# EAGLE board digitboard (EAGLE 9.5.2)
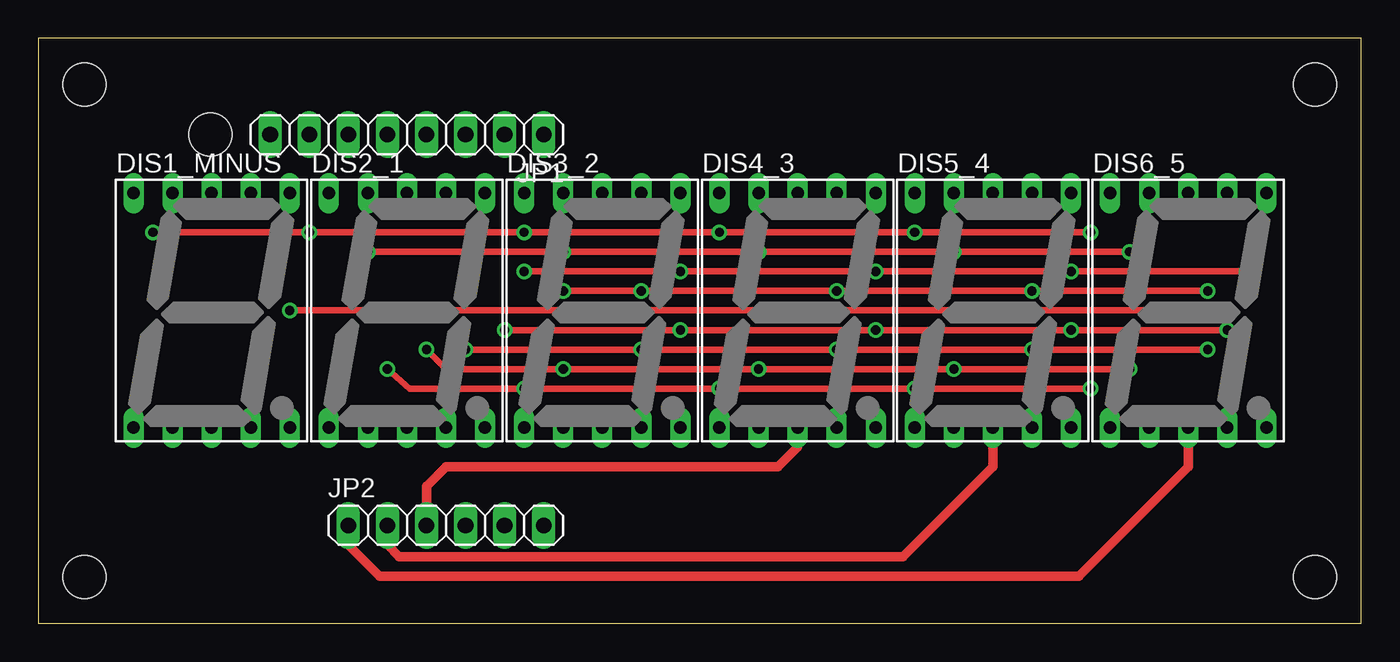
[diagram p0: board, top side]
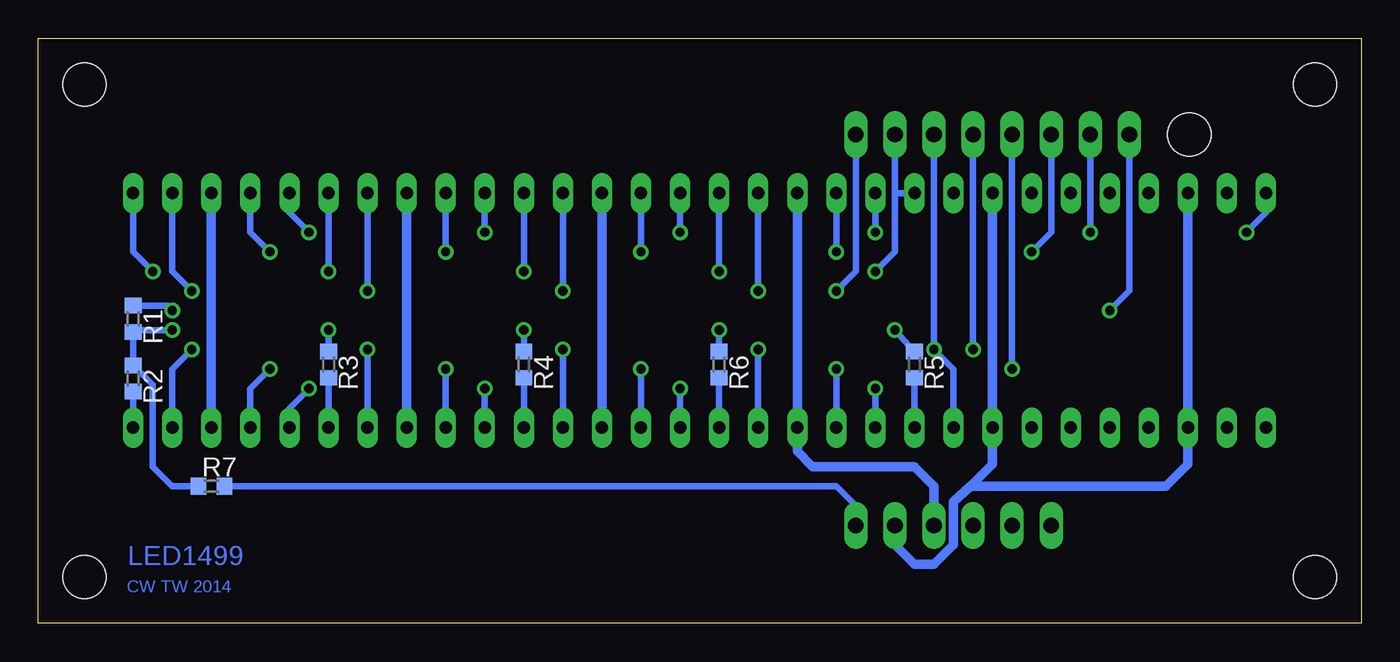
[diagram p1: board, bottom side, seen from below]

Size 86 x 38 mm. Coordinates in mm from the lower left corner, seen from the top.
Outline: 0,0 86,0 86,38 0,38 0,0
Copper layers (1*16): Top 0.035mm / dielectric 1.5mm / Bottom 0.035mm
Design rules "eigene_max1499": minimum track width 10mil, minimum drill 23mil, track to track 6mil, track to pad 6mil, pad to pad 6mil, via to via 6mil, smd to smd 6mil, copper to edge 40mil, drill to drill 8mil, minimum pad ring 10mil, minimum via ring 8mil, stop-mask expansion 4mil, vias tented up to drill 0mil, thermal gap 10mil
Holes 2.8 mm at 3,3 83,3 83,35 3,35 11.17,31.75

## Footprints (pad centres in the part's own frame; a part is rotated, then mirrored left to right if it is on the bottom)
HDSP-M = drill 0.813 long: 1 -5.08,-7.62; 2 -2.54,-7.62; 3 0,-7.62; 4 2.54,-7.62; 5 5.08,-7.62; 6 5.08,7.62; 7 2.54,7.62; 8 0,7.62; 9 -2.54,7.62; 10 -5.08,7.62
1X08 = drill 1.016 long: 1 -8.89,0; 2 -6.35,0; 3 -3.81,0; 4 -1.27,0; 5 1.27,0; 6 3.81,0; 7 6.35,0; 8 8.89,0
1X06 = drill 1.016 long: 1 -6.35,0; 2 -3.81,0; 3 -1.27,0; 4 1.27,0; 5 3.81,0; 6 6.35,0
R0603 = smd 1 x 1.1: 1 -0.85,0; 2 0.85,0

## Placement (x,y rotation side)
DIS1_MINUS  HD-H103  [HDSP-M]  11.26,20.32 0 top
DIS2_1  HD-H103  [HDSP-M]  23.96,20.32 0 top
DIS3_2  HD-H103  [HDSP-M]  36.66,20.32 0 top
DIS4_3  HD-H103  [HDSP-M]  49.36,20.32 0 top
DIS5_4  HD-H103  [HDSP-M]  62.06,20.32 0 top
DIS6_5  HD-H103  [HDSP-M]  74.76,20.32 0 top
JP1  [1X08]  23.96,31.75 180 top
JP2  [1X06]  26.5,6.35 0 top
R1  [R0603]  79.84,19.78 270 bottom
R2  [R0603]  79.84,15.9 270 bottom
R3  [R0603]  67.14,16.8 270 bottom
R4  [R0603]  54.44,16.8 270 bottom
R5  [R0603]  29.04,16.8 270 bottom
R6  [R0603]  41.74,16.8 270 bottom
R7  [R0603]  74.76,8.89 0 bottom

## Library data of the parts
DIS1_MINUS DIS2_1 DIS3_2 DIS4_3 DIS5_4 DIS6_5 = display-hp; OC_FARNELL: unknown; OC_NEWARK: unknown
JP1 JP2 = pinhead
R1-R7 = rcl

## Nets
N$1: JP2.6 R7.2
N$2: R1.2 R2.1 R3.1 R4.1 R5.1 R6.1 R7.1
N$3: JP1.8 R1.1
N$4: DIS6_5.5 R2.2
N$5: DIS5_4.5 R3.2
N$6: DIS4_3.5 R4.2
N$7: DIS3_2.5 R6.2
N$8: DIS2_1.5 R5.2
N$42: DIS3_2.7 DIS4_3.7 DIS5_4.7 DIS6_5.7 JP1.1
N$43: DIS2_1.6 DIS3_2.6 DIS4_3.6 DIS5_4.6 DIS6_5.6 JP1.2
N$44: DIS2_1.4 DIS3_2.4 DIS4_3.4 DIS5_4.4 DIS6_5.4 JP1.3
N$45: DIS3_2.2 DIS4_3.2 DIS5_4.2 DIS6_5.2 JP1.4
N$46: DIS3_2.1 DIS4_3.1 DIS5_4.1 DIS6_5.1 JP1.5
N$47: DIS3_2.9 DIS4_3.9 DIS5_4.9 DIS6_5.9 JP1.6
N$48: DIS1_MINUS.10 DIS3_2.10 DIS4_3.10 DIS5_4.10 DIS6_5.10 JP1.7
N$50: DIS6_5.3 DIS6_5.8 JP2.1
N$51: DIS5_4.3 DIS5_4.8 JP2.2
N$52: DIS4_3.3 DIS4_3.8 JP2.3
N$53: DIS3_2.3 DIS3_2.8 JP2.4
N$54: DIS1_MINUS.3 DIS1_MINUS.8 DIS2_1.3 DIS2_1.8 JP2.5

## Tracks (layer width: path | path; a pad name or v marks a point on that pad's centre or on a via)
N$1
  Bottom 0.406: R7.2 34.12,8.89 32.85,7.62 JP2.6
N$2  (via drill 0.6)
  Top 0.406: v30.31,19.05 v41.74,19.05 v54.44,19.05 v67.14,19.05 v77.3,19.05
  Bottom 0.406: R5.1 v30.31,19.05 | v41.74,19.05 R6.1 | R4.1 v54.44,19.05 | R3.1 v67.14,19.05 | v77.3,19.05 79.72,19.05 R1.2 R2.1 78.57,15.48 78.57,10.16 77.3,8.89 R7.1
N$3  (via drill 0.6)
  Top 0.406: v16.34,20.32 v77.3,20.32
  Bottom 0.406: JP1.8 15.07,21.59 v16.34,20.32 | R1.1 77.61,20.63 v77.3,20.32
N$4
  Bottom 0.406: R2.2 DIS6_5.5
N$5
  Bottom 0.406: R3.2 DIS5_4.5
N$6
  Bottom 0.406: R4.2 DIS4_3.5
N$7
  Bottom 0.406: R6.2 DIS3_2.5
N$8
  Bottom 0.406: R5.2 DIS2_1.5
N$42  (via drill 0.6)
  Top 0.406: v76.03,21.59 v64.6,21.59 v51.9,21.59 v39.2,21.59 v34.12,21.59
  Bottom 0.406: DIS5_4.7 v64.6,21.59 | DIS3_2.7 v39.2,21.59 | DIS4_3.7 v51.9,21.59 | v76.03,21.59 77.3,22.86 DIS6_5.7 | JP1.1 32.85,22.86 v34.12,21.59
N$43  (via drill 0.6)
  Top 0.406: v31.58,22.86 v41.74,22.86 v54.44,22.86 v67.14,22.86 v78.57,22.86
  Bottom 0.406: DIS5_4.6 v67.14,22.86 | v54.44,22.86 DIS4_3.6 | v41.74,22.86 DIS3_2.6 | v78.57,22.86 79.84,24.13 DIS6_5.6 | v31.58,22.86 30.31,24.13 30.31,27.94 | 30.31,27.94 JP1.2 | DIS2_1.6 30.31,27.94
N$44  (via drill 0.6)
  Top 0.406: v76.03,17.78 v64.6,17.78 v51.9,17.78 v39.2,17.78 v27.77,17.78
  Bottom 0.406: DIS2_1.4 26.5,16.5 v27.77,17.77 v27.77,17.78 JP1.3 | v39.2,17.78 DIS3_2.4 | v51.9,17.78 DIS4_3.4 | v64.6,17.78 DIS5_4.4 | v76.03,17.78 77.3,16.51 DIS6_5.4
N$45  (via drill 0.6)
  Top 0.406: v70.95,16.51 v59.52,16.51 v46.82,16.51 v34.12,16.51 26.5,16.51 v25.23,17.78
  Bottom 0.406: DIS3_2.2 v34.12,16.51 | v46.82,16.51 DIS4_3.2 | DIS5_4.2 v59.52,16.51 | JP1.4 v25.23,17.78 | v70.95,16.51 72.22,15.24 DIS6_5.2
N$46  (via drill 0.6)
  Top 0.406: v68.41,15.24 v56.98,15.24 v44.28,15.24 v31.58,15.24 24.13,15.24 v22.69,16.51
  Bottom 0.406: DIS3_2.1 v31.58,15.24 | v44.28,15.24 DIS4_3.1 | DIS5_4.1 v56.98,15.24 | v22.69,16.51 JP1.5 | v68.41,15.24 69.68,13.97 DIS6_5.1
N$47  (via drill 0.6)
  Top 0.406: v70.95,24.13 v59.52,24.13 v46.82,24.13 v34.12,24.13 v21.42,24.13
  Bottom 0.406: DIS3_2.9 v34.12,24.13 | DIS4_3.9 v46.82,24.13 | DIS5_4.9 v59.52,24.13 | v70.95,24.13 72.22,25.4 DIS6_5.9 | JP1.6 20.15,25.4 v21.42,24.13
N$48  (via drill 0.6)
  Top 0.406: v7.45,25.4 v17.61,25.4 v31.58,25.4 v44.28,25.4 v56.98,25.4 v68.41,25.4
  Bottom 0.406: DIS3_2.10 v31.58,25.4 | DIS4_3.10 v44.28,25.4 | DIS5_4.10 v56.98,25.4 | JP1.7 v17.61,25.4 | v68.41,25.4 69.68,26.67 DIS6_5.10 | DIS1_MINUS.10 6.18,26.67 v7.45,25.4
N$50
  Top 0.61: DIS6_5.3 74.76,10.16 67.64,3.04 22.19,3.04 20.15,5.08 JP2.1
  Bottom 0.61: DIS6_5.8 DIS6_5.3
N$51
  Top 0.61: DIS5_4.3 62.06,10.16 56.21,4.31 23.46,4.31 22.69,5.08 JP2.2
  Bottom 0.61: DIS5_4.8 DIS5_4.3
N$52
  Top 0.61: JP2.3 25.23,8.89 26.5,10.16 48.09,10.16 49.36,11.43 DIS4_3.3
  Bottom 0.61: DIS4_3.8 DIS4_3.3
N$53
  Bottom 0.61: DIS3_2.8 DIS3_2.3 36.66,11.16 35.66,10.16 29.04,10.16 27.77,8.89 JP2.4
N$54
  Bottom 0.61: DIS2_1.8 DIS2_1.3 23.96,10.33 25.4,8.89 | DIS1_MINUS.3 DIS1_MINUS.8 11.26,10.33 12.7,8.89 25.4,8.89 | JP2.5 30.31,5.08 29.04,3.81 27.77,3.81 26.5,5.08 26.5,7.89 25.4,8.89

## Text on the board
Bottom: LED1499 | CW TW 2014